# EAGLE board traffic light micro bit (EAGLE 9.7.0)

Size 63.14 x 79.89 mm. Coordinates in mm from the lower left corner, seen from the top.
Outline: 0,0 63.14,0 63.14,79.89 0,79.89 0,0
Copper layers (1*16): Top 0.035mm / dielectric 1.5mm / Bottom 0.035mm
Design rules "default": minimum track width 6mil, minimum drill 0.35mm, track to track 6mil, track to pad 6mil, pad to pad 6mil, via to via 6mil, smd to smd 6mil, copper to edge 40mil, drill to drill 6mil, minimum pad ring 10mil, minimum via ring 8mil, stop-mask expansion 4mil, vias tented up to drill 0mil, thermal gap 10mil

## Footprints (pad centres in the part's own frame; a part is rotated, then mirrored left to right if it is on the bottom)
LEDRD254W60D565H860B_G = drill 0.981 pad 1.581: 1 -1.27,0; 2 1.27,0
LEDRD254W60D565H860B_Y = drill 0.981 pad 1.581: 1 -1.27,0; 2 1.27,0
LEDRD254W60D565H860B = drill 0.981 pad 1.581: 1 -1.27,0; 2 1.27,0
MIC127-140-A01 = smd 0.8 x 2.502: P$1 24.765,2.54; P$2 23.495,2.54; P$3 22.225,2.54; P$4 20.955,2.54; P$5 19.685,2.54; P$6 18.415,2.54; P$7 17.145,2.54; P$8 15.875,2.54; P$9 14.605,2.54; P$10 13.335,2.54; P$11 12.065,2.54; P$12 10.795,2.54; P$13 9.525,2.54; P$14 8.255,2.54; P$15 6.985,2.54; P$16 5.715,2.54; P$17 4.445,2.54; P$18 3.175,2.54; P$19 1.905,2.54; P$20 0.635,2.54; P$21 -0.635,2.54; P$22 -1.905,2.54; P$23 -3.175,2.54; P$24 -4.445,2.54; P$25 -5.715,2.54; P$26 -6.985,2.54; P$27 -8.255,2.54; P$28 -9.525,2.54; P$29 -10.795,2.54; P$30 -12.065,2.54; P$31 -13.335,2.54; P$32 -14.605,2.54; P$33 -15.875,2.54; P$34 -17.145,2.54; P$35 -18.415,2.54; P$36 -19.685,2.54; P$37 -20.955,2.54; P$38 -22.225,2.54; P$39 -23.495,2.54; P$40 -24.765,2.54 | drill 1.1 pad 2.3: P$41 26.899,-1.168; P$42 -26.899,-1.168
RESAD1016W63L850D250B = drill 0.83 pad 1.43: 1 -5.08,0; 2 5.08,0

## Placement (x,y rotation side)
D1  GREEN  [LEDRD254W60D565H860B_G]  39.34,16.59 180 top
D3  YELLOW  [LEDRD254W60D565H860B_Y]  46.96,16.59 180 top
D4  RED  [LEDRD254W60D565H860B]  54.58,16.59 180 top
MB1  MICRO:BIT_MIC127  [MIC127-140-A01]  31.57,69.1 180 top
R1  200  [RESAD1016W63L850D250B]  40.61,8.97 90 top
R2  200  [RESAD1016W63L850D250B]  48.23,8.97 90 top
R3  200  [RESAD1016W63L850D250B]  55.85,8.97 90 top

## Library data of the parts
D1 = Tinkercad; CATEGORY: Opto-Electronic; SUB-CATEGORY: LED; VALUE: LED_GREEN
D3 = Tinkercad; CATEGORY: Opto-Electronic; SUB-CATEGORY: LED; VALUE: LED_YELLOW
D4 = Tinkercad; CATEGORY: Opto-Electronic; SUB-CATEGORY: LED; VALUE: LED_RED
MB1 R1-R3 = Tinkercad

## Nets
D1_A: D1.1 R1.2
D3_A: D3.1 R2.2
D4_A: D4.1 R3.2
MB1_GND: D1.2 D3.2 D4.2 MB1.P$35 MB1.P$36 MB1.P$37 MB1.P$38 MB1.P$39 MB1.P$40
MB1_P0: MB1.P$2 MB1.P$3 MB1.P$4 MB1.P$5 R1.1
MB1_P1: MB1.P$10 MB1.P$11 MB1.P$12 MB1.P$13 R2.1
MB1_P2: MB1.P$19 MB1.P$20 MB1.P$21 MB1.P$22 R3.1

## Tracks (layer width: path | path; a pad name or v marks a point on that pad's centre or on a via)
D1_A  (1 unrouted)
D3_A  (1 unrouted)
D4_A  (1 unrouted)
MB1_GND  (8 unrouted)
MB1_P0  (4 unrouted)
MB1_P1  (4 unrouted)
MB1_P2  (4 unrouted)